# EAGLE board usbprog (EAGLE 5.11)
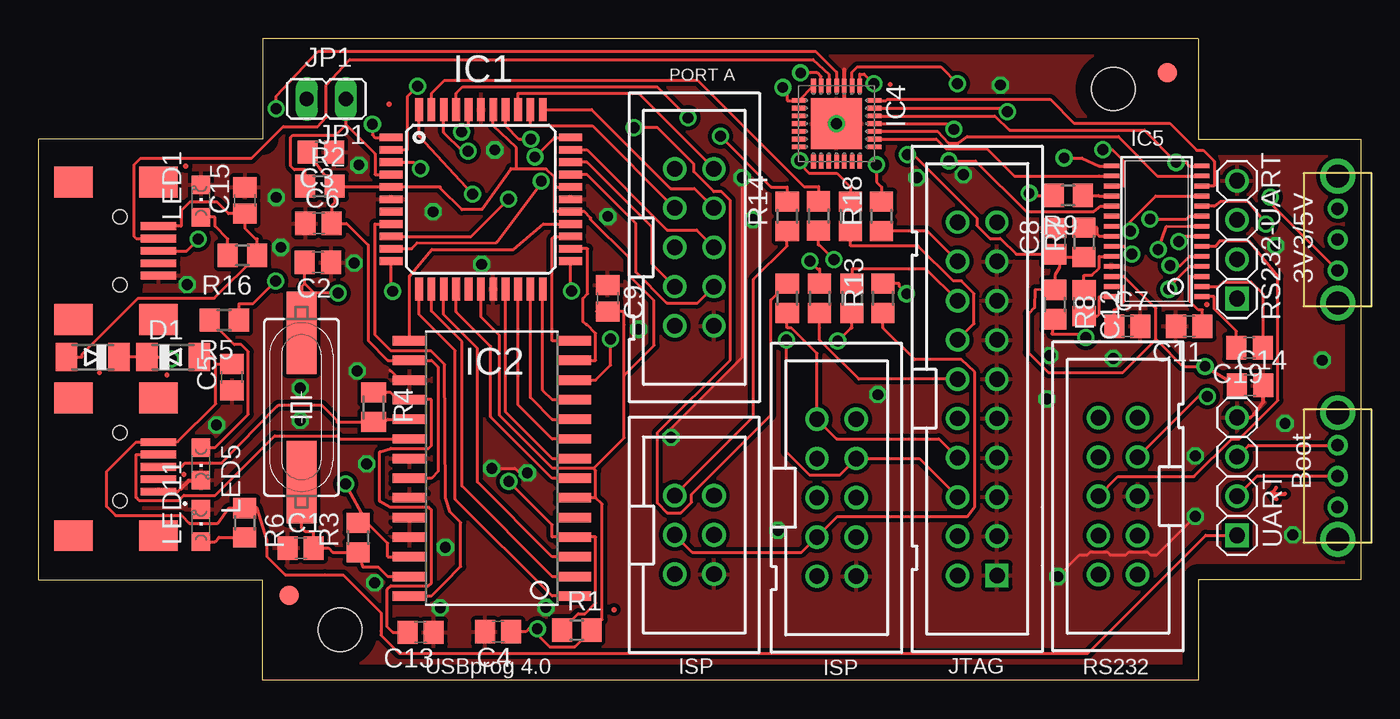
[diagram p0: board, top side]
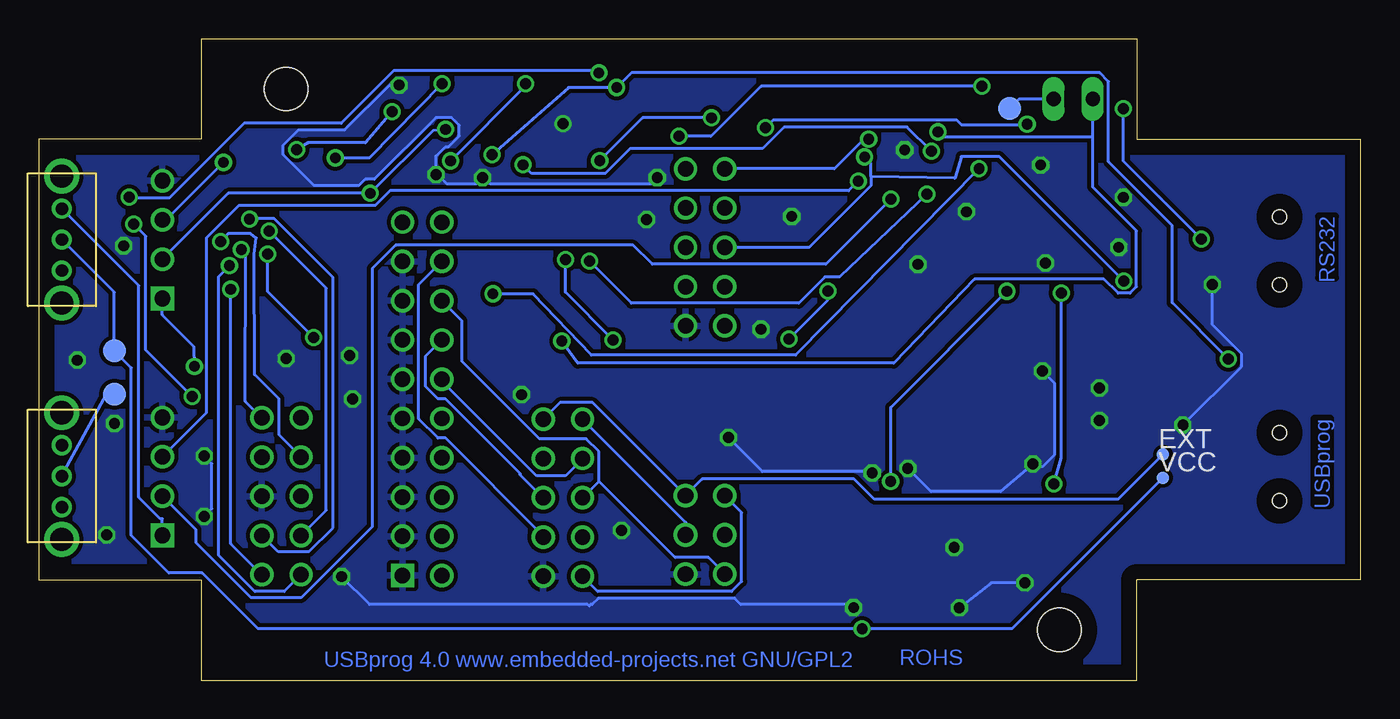
[diagram p1: board, bottom side, seen from below]

Size 85.5 x 41.5 mm. Coordinates in mm from the lower left corner, seen from the top.
Outline: 0,6.5 14.5,6.5 14.5,0 75,0 75,6.5 85.5,6.5 85.5,35 75,35 75,41.5 14.5,41.5 14.5,35 0,35 0,6.5
Copper layers (1*16): Top 0.035mm / dielectric 1.5mm / Bottom 0.035mm
Design rules "8mils *": minimum track width 8mil, minimum drill 0.6mm, track to track 10mil, track to pad 10mil, pad to pad 10mil, via to via 10mil, smd to smd 0mil, copper to edge 40mil, drill to drill 10mil, minimum pad ring 10mil, minimum via ring 8mil, stop-mask expansion 0mil, vias tented up to drill 40mil, thermal gap 10mil
Net classes: 0 default: width 0.203 mm, drill 0.7 mm, clearance 0.203 mm; 1 500mA: width 0.203 mm, drill 0.7 mm, clearance 0.203 mm; 2 CP2102: width 0.203 mm, drill 0.7 mm, clearance 0.203 mm
Holes 2.8 mm at 69.5,38.25 19.5,3.25

## Footprints (pad centres in the part's own frame; a part is rotated, then mirrored left to right if it is on the bottom)
C0805 = smd 1.3 x 1.5: 1 -0.85,0; 2 0.85,0
MINIMELF = smd 1.4 x 1.8: A 1.7,0; C -1.7,0
TP08R = smd 0.8 x 0.8: TP 0,0
PASSERMARKEN_FIDUCIAL = smd 1.27 x 1.27: 1 0,0
TQFP44 = smd 1.5 x 0.5: 1 -5.8,4; 2 -5.8,3.2; 3 -5.8,2.4; 4 -5.8,1.6; 5 -5.8,0.8; 6 -5.8,0; 7 -5.8,-0.8; 8 -5.8,-1.6; 9 -5.8,-2.4; 10 -5.8,-3.2; 11 -5.8,-4; 23 5.8,-4; 24 5.8,-3.2; 25 5.8,-2.4; 26 5.8,-1.6; 27 5.8,-0.8; 28 5.8,0; 29 5.8,0.8; 30 5.8,1.6; 31 5.8,2.4; 32 5.8,3.2; 33 5.8,4 | smd 0.5 x 1.5: 12 -4,-5.8; 13 -3.2,-5.8; 14 -2.4,-5.8; 15 -1.6,-5.8; 16 -0.8,-5.8; 17 0,-5.8; 18 0.8,-5.8; 19 1.6,-5.8; 20 2.4,-5.8; 21 3.2,-5.8; 22 4,-5.8; 34 4,5.8; 35 3.2,5.8; 36 2.4,5.8; 37 1.6,5.8; 38 0.8,5.8; 39 0,5.8; 40 -0.8,5.8; 41 -1.6,5.8; 42 -2.4,5.8; 43 -3.2,5.8; 44 -4,5.8
SO28-3 = smd 0.61 x 2.21: 1 -8.255,-5.315; 2 -6.985,-5.315; 3 -5.715,-5.315; 4 -4.445,-5.315; 5 -3.175,-5.315; 6 -1.905,-5.315; 7 -0.635,-5.315; 8 0.635,-5.315; 9 1.905,-5.315; 10 3.175,-5.315; 11 4.445,-5.315; 12 5.715,-5.315; 13 6.985,-5.315; 14 8.255,-5.315; 15 8.255,5.315; 16 6.985,5.315; 17 5.715,5.315; 18 4.445,5.315; 19 3.175,5.315; 20 1.905,5.315; 21 0.635,5.315; 22 -0.635,5.315; 23 -1.905,5.315; 24 -3.175,5.315; 25 -4.445,5.315; 26 -5.715,5.315; 27 -6.985,5.315; 28 -8.255,5.315
MLP28 = smd 0.9 x 0.3: 1 -2.45,1.5; 2 -2.45,1; 3 -2.45,0.5; 4 -2.45,0; 5 -2.45,-0.5; 6 -2.45,-1; 7 -2.45,-1.5; 15 2.45,-1.5; 16 2.45,-1; 17 2.45,-0.5; 18 2.45,0; 19 2.45,0.5; 20 2.45,1; 21 2.45,1.5 | smd 0.3 x 0.9: 8 -1.5,-2.45; 9 -1,-2.45; 10 -0.5,-2.45; 11 0,-2.45; 12 0.5,-2.45; 13 1,-2.45; 14 1.5,-2.45; 22 1.5,2.45; 23 1,2.45; 24 0.5,2.45; 25 0,2.45; 26 -0.5,2.45; 27 -1,2.45; 28 -1.5,2.45 | smd 3.3 x 3.3: EXP 0,0
MAXIM_TSSOP28 = smd 0.305 x 0.991: 1 -4.225,-2.918; 2 -3.575,-2.918; 3 -2.925,-2.918; 4 -2.275,-2.918; 5 -1.625,-2.918; 6 -0.975,-2.918; 7 -0.325,-2.918; 8 0.325,-2.918; 9 0.975,-2.918; 10 1.625,-2.918; 11 2.275,-2.918; 12 2.925,-2.918; 13 3.575,-2.918; 14 4.225,-2.918; 15 4.225,2.918; 16 3.575,2.918; 17 2.925,2.918; 18 2.275,2.918; 19 1.625,2.918; 20 0.975,2.918; 21 0.325,2.918; 22 -0.325,2.918; 23 -0.975,2.918; 24 -1.625,2.918; 25 -2.275,2.918; 26 -2.925,2.918; 27 -3.575,2.918; 28 -4.225,2.918
MINI-USB-B = smd 2.3 x 0.5: D+ -7.75,0; D- -7.75,-0.8; GND -7.75,1.6; ID -7.75,0.8; VBUS -7.75,-1.6 | smd 2.5 x 2: PAD1 -7.75,-4.45; PAD2 -7.75,4.45; PAD3 -2.25,4.45; PAD4 -2.25,-4.45 | hole 0.9: -5.25,2.2; -5.25,-2.2
JP1 = drill 0.914 long: 1 0,-1.27; 2 0,1.27
1X04 = drill 1.016 square: 1 -3.81,0 | drill 1.016 round: 2 -1.27,0; 3 1.27,0; 4 3.81,0
CHIPLED_0805 = smd 1.2 x 1.2: A 0,-1.05; C 0,1.05
TP15R = smd 1.5 x 1.5: TP 0,0
HC49UP = smd 5.334 x 1.93: 1 -4.826,0; 2 4.826,0
R0805 = smd 1.3 x 1.5: 1 -0.95,0; 2 0.95,0
M0805 = smd 1.3 x 1.6: 1 -0.95,0; 2 0.95,0
SWITCH_3X1 = drill 0.8 round: 1 -2,0; 2 0,0; 3 2,0 | drill 1.5 round: P$1 -4.1,0; P$2 4.1,0
CON-3M_PAK100/2500-10 = drill 1 pad 1.422 round: 1 -5.08,-1.27; 2 -5.08,1.27; 3 -2.54,-1.27; 4 -2.54,1.27; 5 0,-1.27; 6 0,1.27; 7 2.54,-1.27; 8 2.54,1.27; 9 5.08,-1.27; 10 5.08,1.27
PINHEADER2X3_PINHEADER3X2 = drill 1.02 round: 1 -1.27,2.54; 2 1.27,2.54; 3 -1.27,0; 4 1.27,0; 5 -1.27,-2.54; 6 1.27,-2.54
CON-3M_PAK100/2500-20 = drill 1 pad 1.422 round: 1 -11.43,-1.27; 2 -11.43,1.27; 3 -8.89,-1.27; 4 -8.89,1.27; 5 -6.35,-1.27; 6 -6.35,1.27; 7 -3.81,-1.27; 8 -3.81,1.27; 9 -1.27,-1.27; 10 -1.27,1.27; 11 1.27,-1.27; 12 1.27,1.27; 13 3.81,-1.27; 14 3.81,1.27; 15 6.35,-1.27; 16 6.35,1.27; 17 8.89,-1.27; 18 8.89,1.27; 19 11.43,-1.27 | drill 1 pad 1.422 square: 20 11.43,1.27

## Placement (x,y rotation side)
C1  22pF  [C0805]  16.94,8.55 0 top
C2  22pF  [C0805]  18.06,27.03 180 top
C3  100nF  [C0805]  18.25,34.16 180 top
C4  2.2uF  [C0805]  29.71,3.14 180 top
C5  2.2uF  [C0805]  12.5,19.6 90 top
C6  100nF  [C0805]  18.1,29.55 0 top
C7  100nF  [C0805]  70.4,22.9 0 top
C8  2.2uF  [C0805]  65.7,28.4 90 top
C9  100nF  [C0805]  36.8,24.7 270 top
C11  100nF  [C0805]  74.4,22.9 180 top
C12  100nF  [C0805]  67.6,24.4 270 top
C13  100nF  [C0805]  24.7,3.1 180 top
C14  2.2uF  [C0805]  78.33,19.08 0 top
C15  2.2uF  [C0805]  13.34,31.03 90 top
C19  100nF  [C0805]  78.3,21.5 180 top
D1  [MINIMELF]  8.7,20.9 0 top
D2  [MINIMELF]  3.5,20.9 180 top
EXT  PTR1TP08R  [TP08R]  12.8,14.6 0 bottom
FID1  [PASSERMARKEN_FIDUCIAL]  16.2,5.5 0 top
FID2  [PASSERMARKEN_FIDUCIAL]  73,39.3 0 top
IC1  MEGA32-A  [TQFP44]  28.6,31.11 0 top
IC2  USBN9604  [SO28-3]  29.3,13.7 90 top
IC4  CP21021  [MLP28]  51.6,36 270 top
IC5  MAXIM_MAX3243UI  [MAXIM_TSSOP28]  72.3,29.04 90 top
J1  MINI-USB-B  [MINI-USB-B]  0,13.8 180 top
J2  MINI-USB-B  [MINI-USB-B]  0,27.77 180 top
JP1  [JP1]  18.6,37.6 90 top
JP3  DNP  [1X04]  77.5,13.18 90 top
JP6  DNP  [1X04]  77.5,28.5 90 top
LED1  GRUEN  [CHIPLED_0805]  10.5,31 0 top
LED5  ROT  [CHIPLED_0805]  10.5,14 180 top
LED11  GRUEN  [CHIPLED_0805]  10.5,10 0 top
PD0  PTR1TP15R  [TP15R]  80.6,18.5 0 bottom
Q1  24MHz  [HC49UP]  17,17.65 90 top
R1  10K  [R0805]  34.79,3.24 0 top
R2  10K  [R0805]  18.19,31.96 0 top
R3  1M  [R0805]  20.66,9.23 90 top
R4  1K5  [M0805]  21.66,17.65 270 top
R5  270R  [R0805]  12,23.3 180 top
R6  270R  [R0805]  13.33,10.18 270 top
R7  10K  [R0805]  67.6,28.32 90 top
R8  10K  [R0805]  65.72,24.3 270 top
R9  270R  [R0805]  66.58,31.36 180 top
R10  270R  [R0805]  48.4,24.7 90 top
R11  270R  [R0805]  50.5,24.7 90 top
R12  270R  [R0805]  52.6,24.7 270 top
R13  270R  [R0805]  54.6,24.7 90 top
R14  270R  [R0805]  48.4,30 90 top
R15  270R  [R0805]  50.43,30.03 90 top
R16  270R  [R0805]  13.18,27.48 180 top
R17  270R  [R0805]  52.5,30 90 top
R18  270R  [R0805]  54.5,30 90 top
RST  PTR1TP15R  [TP15R]  22.7,37 180 bottom
TP_VCC  PTR1TP15R  [TP15R]  80.6,21.3 0 bottom
U$1  DNP  [SWITCH_3X1]  84,13.2 270 top
U$2  DNP  [SWITCH_3X1]  84,28.5 270 top
VCC  PTR1TP08R  [TP08R]  12.8,13.1 0 bottom
Y1  DNP  [CON-3M_PAK100/2500-10]  42.4,28 270 top
Y2  DNP  [PINHEADER2X3_PINHEADER3X2]  42.4,9.4 0 top
Y3  DNP  [CON-3M_PAK100/2500-10]  51.6,11.8 270 top
Y4  DNP  [CON-3M_PAK100/2500-20]  60.7,18.2 270 top
Y5  DNP  [CON-3M_PAK100/2500-10]  69.8,11.9 90 top

## Library data of the parts
C1 C2 = rcl; IC-ART: 201.011; MF: KEMET; MPN: C0805C150J5GACTU; OC_FARNELL: 1414668
C3 C6 C7 C9 C11-C13 C19 = resistor; IC-ART: 201.081; MF: AVX; MPN: 08055C104KAT2A; OC_FARNELL: 499687
C4 C5 C8 = rcl; IC-ART: 201.050; MF: KEMET; MPN: C1206C105K4RACTU; OC_FARNELL: 1650888
C14 C15 = resistor; IC-ART: 201.050; MF: AVX; MPN: 1206YC225KAT2A; OC_FARNELL: 1833824
D1 D2 = diode; IC-ART: 106.018; MF: VISHAY SEMICONDUCTOR; MPN: BAV103-GS08; OC_FARNELL: 1617729
EXT PD0 RST TP_VCC VCC = testpad
FID1 FID2 = SMDSCHABLONE
IC1 = avr; IC-ART: 100.020; MF: ATMEL; MPN: ATMEGA32A-AU; OC_FARNELL: 1704563
IC2 = bene; IC-ART: 222.333; IC-DECAL: C_SUPI; MF: NATIONAL SEMICONDUCTOR; MPN: USBN9604-28M/NOPB; OC_FARNELL: 1564747
IC4 = CP2102; IC-ART: 102.006; MF: FARNELL; MPN: CP2102-GM; OC_FARNELL: 9282130; OC_NEWARK: 30K5635
IC5 = usbprog; MF: TEXAS INSTRUMENTS; MPN: MAX3243CPWR; OC_FARNELL: 1564899; OC_NEWARK: unknown
J1 J2 = mini-usb-b; IC-ART: 300.035; OC_FARNELL: unknown
JP1 = jumper
JP3 JP6 = pinhead; OC_FARNELL: unknown
LED1 LED11 = led; IC-ART: 107.008; MF: DIALIGHT; MPN: 5988170107F; OC_FARNELL: 1465996
LED5 = led; IC-ART: 107.009; MF: DIALIGHT; MPN: 5988110107F; OC_FARNELL: 1465992
Q1 = SparkFun; MF: TXC; MPN: 9C-24.000MAAJ-T; OC_FARNELL: 1842309
R1 R7 R8 = rcl; IC-ART: 200.119; MF: VISHAY DRALORIC; MPN: CRCW080510K0FKEA; OC_FARNELL: 1469856
R2 = rcl; IC-ART: 200.119; MF: VISHAY DRALORIC; MPN: CRCW0805100KFKTA; OC_FARNELL: 1652905
R3 = rcl; IC-ART: 200.219; MF: YAGEO (PHYCOMP); MPN: RC0805FR-071ML; OC_FARNELL: 9237992
R4 = rcl; IC-ART: 200.033; MF: VISHAY DRALORIC; MPN: CRCW08051K50FKEA; OC_FARNELL: 1652940
R5 R6 = rcl; IC-ART: 200.118; MF: VISHAY DRALORIC; MPN: CRCW0805270RFKEA; OC_FARNELL: 1652970
R9 = rcl; IC-ART: 200.208; MF: VISHAY DRALORIC; MPN: CRCW080510K0FKEA; OC_FARNELL: 1469856
R10-R15 R17 R18 = rcl; IC-ART: 200.058; MF: VISHAY DRALORIC; MPN: CRCW0805100RFKEA; OC_FARNELL: 1469862
R16 = rcl; IC-ART: 200.118; MF: MULTICOMP; MPN: MC 0.1W 0805 5% 1K; OC_FARNELL: 9333711
U$1 U$2 = usbprog_SWITCH_3X1
Y1-Y5 = usbprog; OC_FARNELL: unknown

## Nets
3.3V: IC4.6 U$2.3
AVR_PB0: IC1.40 JP1.2 R12.2
AVR_PB1: IC1.41 R17.2
AVR_PB2: IC1.42 R18.2
AVR_PB3: IC1.43 R15.2
AVR_PB4: IC1.44 R11.2
AVR_PB5: IC1.1 R10.2
AVR_PB6: IC1.2 R14.2
AVR_PB7: IC1.3 R13.2
CTS_RS232: IC5.7 Y5.8
D+_UART [CP2102]: IC4.4 J2.D+
D+_USBPROG: IC2.19 J1.D+ R4.2
D-_UART [CP2102]: IC4.5 J2.D-
D-_USBPROG: IC2.20 J1.D-
DCD_RS232: IC5.4 Y5.1
DSR_RS232: IC5.6 Y5.6
DTR_RS232: IC5.11 Y5.4
EXT_VCC [500mA]: EXT.TP Y2.2 Y3.2
FORCEOFF [CP2102]: IC5.22 R7.2
FORCEON [CP2102]: IC5.23 R8.2
GND: C1.1 C2.1 C3.1 C4.2 C5.1 C6.1 C7.2 C8.2 C9.1 C11.2 C13.1 C14.2 C15.2 IC1.6 IC1.18 IC1.28 IC1.39 IC2.17 IC2.21 IC2.23 IC2.24 IC2.25 IC4.3 IC4.EXP IC5.25 J1.GND J2.GND JP3.4 JP6.4 LED1.C LED5.C LED11.C Y1.10 Y2.6 Y3.10 Y4.4 Y4.6 Y4.8 Y4.10 Y4.12 Y4.14 Y4.16 Y4.18 Y4.20 Y5.5
N$6: IC1.8 IC2.28
N$7: C13.2 IC2.18 R4.1
N$8: C2.2 IC2.26 Q1.2 R3.2
N$9: LED5.A R5.2
N$10: LED11.A R6.2
N$11: C1.2 IC2.27 Q1.1 R3.1
N$12: LED1.A R16.2
N$14 [CP2102]: IC5.20
N$21 [CP2102]: IC5.18 R9.1
N$47: C12.2 IC5.28
N$48: C12.1 IC5.24
N$49: C19.2 IC5.1
N$50: C19.1 IC5.2
N$51: C7.1 IC5.27
N$52: C11.1 IC5.3
NC: Y5.10
PA0: IC1.37 Y1.1
PA1: IC1.36 Y1.2
PA2: IC1.35 Y1.3
PA3: IC1.34 Y1.4
PA4: IC1.33 R5.1 Y1.5
PA5: IC1.32 Y1.6
PA6: IC1.31 Y1.7
PA7: IC1.30 Y1.8
PB0: R12.1 Y2.5 Y3.5 Y4.5
PB1: R18.1 Y3.8 Y4.3
PB2: R17.1 Y3.6 Y4.7
PB3: R15.1 Y3.4 Y4.15
PB4: R11.1 Y3.3 Y4.9
PB5: R10.1 Y2.4 Y3.1 Y4.13
PB6: R14.1 Y2.1 Y3.9
PB7: R13.1 Y2.3 Y3.7
PC0: IC1.19 IC2.8
PC1: IC1.20 IC2.9
PC2: IC1.21 IC2.10
PC3: IC1.22 IC2.11
PC4: IC1.23 IC2.12
PC5: IC1.24 IC2.13
PC6: IC1.25 IC2.14
PC7: IC1.26 IC2.15
PD0: IC1.9 JP3.2 PD0.TP U$1.2
PD1: IC1.10 JP3.3 U$1.1
PD2: IC1.11 IC2.4 R1.1
PD3: IC1.12 IC2.1
PD4: IC1.13 IC2.2
PD5: IC1.14 IC2.3
PD6: IC1.15 IC2.7
PD7: IC1.16
RESET: IC1.4 JP1.1 R2.1 RST.TP
RI_RS232: IC5.8 Y5.9
RTS_RS232: IC5.10 Y5.7
RXD_RS232: IC5.5 Y5.2
TXD_RS232: IC5.9 Y5.3
UART_CTS [CP2102]: IC4.23 IC5.16
UART_DCD [CP2102]: IC4.1 IC5.19
UART_DSR [CP2102]: IC4.27 IC5.17
UART_DTR [CP2102]: IC4.28 IC5.12
UART_RI [CP2102]: IC4.2 IC5.15
UART_RTS [CP2102]: IC4.24 IC5.13
UART_RXD [CP2102]: IC4.25 JP6.2 R9.2
UART_TXD [CP2102]: IC4.26 IC5.14 JP6.3
VBUS_CP2102 [500mA]: C15.1 D2.A J2.VBUS R16.1
VBUS_USBPROG [500mA]: C5.2 D1.A J1.VBUS JP3.1 R6.1 U$2.1
VBUS_USBPROG_CP2102 [500mA]: C8.1 C14.1 D1.C D2.C IC4.7 IC4.8 IC5.26 JP6.1 R7.1 R8.1
VCC [500mA]: C3.2 C4.1 C6.2 C9.2 IC1.5 IC1.17 IC1.27 IC1.29 IC1.38 IC2.6 IC2.16 IC2.22 R1.2 R2.2 TP_VCC.TP U$2.2 VCC.TP

## Tracks (layer width: path | path; a pad name or v marks a point on that pad's centre or on a via)
3.3V  (via drill 0.7 pad 0.95)
  Top 0.203: v49.27,39.28 50.36,39.28 50.6,39.05 IC4.6 | U$2.3 79.65,30.85 v79.65,31.26
  Bottom 0.203: v79.65,31.26 79.58,31.19 77.05,31.19 72.22,36.02 65.94,36.02 62.53,39.43 49.41,39.43 v49.27,39.28
AVR_PB0  (via drill 0.7 pad 0.95)
  Top 0.203: R12.2 52.6,22.8 52.53,22.8 v51.67,21.94 | IC1.40 27.8,35.85 27.73,35.85 v27.34,35.47
  Bottom 0.203: 17.33,35.13 JP1.2 | v27.34,35.47 27.01,35.13 17.33,35.13 | v51.67,21.94 50.64,20.51 30.21,20.51 24.98,25.94 16.6,25.94 15.69,25.03 14.93,25.03 14.51,25.45 14.51,29.08 17.33,31.9 17.33,35.13
AVR_PB1  (via drill 0.7 pad 0.95)
  Top 0.203: v49.22,33.61 49.22,33.4 49.82,32.8 51.61,32.8 52.5,31.91 R17.2 | IC1.41 27,37.97 27.42,38.38 39.99,38.38 v41.99,36.38
  Bottom 0.203: v41.99,36.38 46.45,36.38 v49.22,33.61
AVR_PB2  (via drill 0.7 pad 0.95)
  Top 0.203: R18.2 54.5,31.91 54.18,32.23 v54.18,33.34 | IC1.42 26.2,35.85 26.2,35.43 27.41,34.22 v27.77,34.22
  Bottom 0.203: v54.18,33.34 53.61,32.78 48.87,32.78 47.26,34.39 38.7,34.39 37.3,35.79 29.34,35.79 v27.77,34.22
AVR_PB3
  Top 0.203: IC1.43 25.4,37.97 26.25,38.81 42.6,38.81 49.48,31.93 50.43,31.93 R15.2
AVR_PB4  (via drill 0.7 pad 0.95)
  Top 0.203: v28.05,31.45 24.6,35.19 IC1.44 | R11.2 50.5,26.61 50.37,26.61 v49.87,27.1
  Bottom 0.203: v49.87,27.1 47.17,24.39 36.35,24.39 34.66,26.09 33.7,26.09 v28.05,31.45
AVR_PB5  (via drill 0.7 pad 0.95)
  Top 0.203: IC1.1 21.75,35.11 21.58,35.27 v21.58,35.97 | R10.2 47.34,24.59 47.34,17.15 42.22,12.03 42.22,11.52 41.53,10.83 40.64,10.83 40.02,11.45 40.02,16.02 44.73,20.73 44.73,31.04 44.17,31.59 43.66,31.59 42.37,32.89 42.37,33.39 40.03,35.73 v38.51,35.73
  Bottom 0.203: v38.51,35.73 37.99,36.25 26.15,36.25 25.84,35.95 21.61,35.95 v21.58,35.97
AVR_PB6  (via drill 0.7 pad 0.95)
  Top 0.203: R14.2 48.4,31.91 47.37,31.91 v44.09,35.18 | IC1.2 23.86,34.31 23.86,37.77 v24.5,38.42
  Bottom 0.203: v44.09,35.18 42.03,35.18 38.79,38.42 v24.5,38.42
AVR_PB7  (via drill 0.7 pad 0.95)
  Top 0.203: R13.2 55.66,25.65 55.66,25.46 v56.13,24.99 | v24.69,33.08 24.26,33.51 IC1.3
  Bottom 0.203: v56.13,24.99 53.53,24.99 49.76,21.02 36.55,21.02 v24.69,33.08
CTS_RS232  (via drill 0.7 pad 0.95)
  Top 0.203: v73.74,28.38 74.08,28.71 IC5.7
  Bottom 0.203: Y5.8 69.96,15.87 69.96,18.19 71.54,19.77 71.57,27.58 71.47,28.33 71.43,28.61 71.8,28.88 73.23,28.88 v73.74,28.38
D+_UART  (via drill 0.7 pad 0.95)
  Top 0.203: v15.37,36.96 15.37,37.78 18.08,40.67 50.24,40.67 51.6,39.34 IC4.4 | J2.D+ 9.56,27.77 v10.31,28.52
  Bottom 0.203: v10.31,28.52 15.37,33.58 v15.37,36.96
D+_USBPROG
  Top 0.203: J1.D+ 9.21,13.8 9.45,14.04 11.85,14.04 15.4,17.7 15.5,17.8 18.3,17.8 19.3,16.8 19.3,16.7 R4.2 22.4,16.7 22.57,16.88 IC2.19
D-_UART
  Top 0.203: IC4.5 51.1,39.2 50.07,40.14 20.11,40.14 18.6,38.5 18.6,36.4 18.05,35.81 15.81,35.81 13.77,33.76 6.58,33.76 6.18,33.36 6.18,28.68 6.29,28.57 J2.D-
D-_USBPROG
  Top 0.203: J1.D- 6.29,14.6 6.29,11.82 6.47,11.64 9.08,11.64 9.39,11.96 11.42,11.96 15.28,15.81 19.3,15.81 19.51,15.61 IC2.20
DCD_RS232  (via drill 0.7 pad 0.95)
  Top 0.203: v73.08,25.28 73.08,25.43 74.42,26.77 IC5.4
  Bottom 0.203: v73.08,25.28 73.08,8.83 Y5.1
DSR_RS232
  Top 0.203: Y5.6 69.8,13.17 74.71,13.17 77.14,15.61 77.64,15.61 80.14,18.11 80.14,26.11 78.25,28.41 76.38,28.41 76.14,28.07 IC5.6
DTR_RS232  (via drill 0.7 pad 0.95)
  Top 0.203: IC5.11 72.24,31.32 70.6,29.67 v70.6,29.06
  Bottom 0.203: Y5.4 66.9,10.99 66.9,25.36 v70.6,29.06
EXT_VCC
  Bottom 0.203: EXT.TP 15.7,11.7 31.44,11.7 32.77,13.02 42.59,13.02 Y2.2 49.68,17.95 51.8,17.95 Y3.2
FORCEOFF
  Top 0.203: IC5.22 68.58,28.71 68.45,28.85 68.45,29.27 R7.2
FORCEON  (via drill 0.7 pad 0.95)
  Top 0.203: R8.2 65.52,22.39 67.48,22.39 v67.71,22.17 | IC5.23 70.18,28.07 70.7,27.55 v70.69,27.56
  Bottom 0.203: v67.71,22.17 70.7,25.16 v70.69,27.56
GND  (via drill 0.7, 0.7 pad 0.95)
  Top 0.203: v65.9,6.7 67.3,8.1 67.8,8.1 68,8.3 69.1,8.3 69.3,8.1 70.3,8.1 70.5,8.3 71.7,8.3 71.9,8.1 72.3,8.1 v74.8,10.6 | 78.6,17.2 78.4,17 JP3.4 | 9.2,12.4 9,12.2 7.8,12.2 J1.GND | IC4.EXP 52.2,36 52.2,37 52.1,37.1 52.1,37.3 52.1,38.4 IC4.3 | v45.5,32.5 45.5,20.9 40.9,16.3 v40.9,15.7 | v31.6,13.4 31.1,13.4 30.8,13.7 v29.3,13.7 | IC2.17 23.9,19.5 23.3,19.5 22.8,20 22.72,20.04
  Top 0.25: LED5.C 9.7,12.9 9.2,12.4 | C14.2 79.2,18 78.6,17.2 | 52.1,37.3 52.1,39.5
  Bottom 0.203: v21.73,6.3 23.9,6.3 v25.97,4.68 | v32.8,4.7 33,4.7 33.2,4.9 40.1,4.9 40.5,5.3 49.3,5.3 49.7,4.9 49.8,4.9 49.9,4.8 50,4.9 64.1,4.9 v65.9,6.7 | v74.8,10.6 74.3,11.1 74.3,14 v74.8,14.5 | v9.6,25.6 9.6,23 7.7,21.1 7.7,20.3 v11.5,16.5 | v62.2,38.5 62.8,38.5 65.7,35.6 68.7,35.6 69.7,34.6 69.7,34 67.7,32 64.8,32 64.4,32.4 63.8,32.4 59.8,36.4 58.8,36.4 58.3,35.9 58.3,35.2 59,34.5 59.2,34.5 59.8,33.9 v59.8,32.7 59.7,32.7 59.1,32.1 57.2,32.1 v56.8,32.5 56.7,32.5 56.3,32.1 45.9,32.1 v45.5,32.5 | v40.9,15.7 38.7,13.5 31.7,13.5 v31.6,13.4 | v29.3,13.7 27.8,12.2 23.3,12.2 v21.2,14 21.6,13.8 20.6,13.8 19.8,14.6 19.8,19.2 v20.6,20
  other vias: 26.3,8.6 16.9,16.8 16.9,18.9 69.5,20.8 65.4,21 65.2,18.2 80,28.1 83,20.7 81.1,9.4 80.6,16.6 38.8,22.7 36.8,30 46.2,29.8 25.5,30.3 29.5,34.3 15.36,31.23 20.71,33.33 20.41,26.99 15.66,28 28.65,26.9 54.28,18.47 47.8,9.7 51.6,36
  pour Bottom: -4.6,46.5 86.4,45.3 86.4,-2.3 -4.6,-1.1
  pour Top: -2.1,43 87.5,43 87.5,-1.2 -2.5,-1.2
N$4
  Top 0.25: 79.97,12.06 80.61,12.06
N$5
  Top 0.25: 80.01,12.45 79.77,12.11
N$6
  Top 0.203: IC1.8 21.75,29.51 21.75,22.34 22.79,21.3 25.37,21.3 26.26,20.41 26.3,11.8 26.6,10.9 27.3,10.2 27.3,7.35 26.26,6.31 25.39,5.45 IC2.28
N$7
  Top 0.203: C13.2 22.89,3.1 22.54,3.45 22.54,5.87 22.78,6.11 25.23,6.11 25.39,6.27 25.39,11.02 25.23,11.19 22.73,11.19 22.06,11.56 22.06,14.78 22.78,14.99 25.22,14.99 25.39,15.17 25.39,18.14 IC2.18 23.22,18.14 22.77,18.6 R4.1
N$8  (via drill 0.7 pad 0.95)
  Top 0.203: 21.25,10.18 v19.85,12.7 | 21.25,10.18 22.57,8.86 22.57,7.99 IC2.26 | 21.25,10.18 R3.2 | 17.21,25.66 C2.2 | 17.21,25.66 17,25.45 17,23.31 Q1.2 | v19.37,25.05 17.82,25.05 17.21,25.66
  Bottom 0.203: v19.85,12.7 19.37,14.38 v19.37,25.05
N$9
  Top 0.203: R5.2 12.65,21.7 13.1,21.7 13.55,21.25 13.55,17.2 11.4,15.05 LED5.A
N$10
  Top 0.203: R6.2 11.64,9.25 11.64,9.19 11.4,8.95 LED11.A
N$11
  Top 0.203: IC2.27 22.57,6.71 21.96,7.33 20.96,7.33 R3.1 19.02,8.28 18.75,8.55 C1.2 17.79,9.61 17.25,9.61 17,9.85 Q1.1
N$12
  Top 0.203: LED1.A 11.4,29.95 11.4,29.36 12.23,28.54 R16.2
N$13
  Top 0.25: 80.04,11.71 79.71,12.12
N$21
  Top 0.203: IC5.18 68.58,31.32 68.54,31.36 R9.1
N$47
  Top 0.203: C12.2 68.45,23.55 68.58,23.68 68.58,24.82 IC5.28
N$48
  Top 0.203: C12.1 67.6,26.2 68.12,26.2 68.58,26.67 68.58,27.41 IC5.24
N$49
  Top 0.203: IC5.1 76.02,24.82 76.02,24.02 77.45,22.58 C19.2
N$50
  Top 0.203: IC5.2 76.32,25.46 76.61,25.76 78.39,25.76 79.15,25 C19.1
N$51
  Top 0.203: C7.1 69.55,23.95 69.63,23.95 70.18,24.51 70.18,25.46 IC5.27
N$52
  Top 0.203: C11.1 75.25,23.95 75,23.95 74.42,24.54 74.42,26.11 IC5.3
PA0  (via drill 0.7 pad 0.95)
  Top 0.203: IC1.37 30.2,35.85 31.05,35.01 v31.83,35.01
  Bottom 0.203: Y1.1 34.04,33.08 32.12,35.01 v31.83,35.01
PA1
  Top 0.203: Y1.2 38.78,37.97 31,37.97 IC1.36
PA2
  Top 0.203: IC1.35 31.8,35.85 35.81,35.85 Y1.3
PA3
  Top 0.203: Y1.4 42.4,31.81 40.86,31.81 35.76,36.91 IC1.34
PA4  (via drill 0.7 pad 0.95)
  Top 0.203: IC1.33 33.34,35.11 33.34,35.1 v32.09,33.85 | R5.1 12.95,24.36 13.86,24.36 v15.32,25.81
  Bottom 0.203: 31.69,32.58 26.27,32.48 25.83,33.87 23.38,33.87 v15.32,25.81 | 31.69,32.58 31.69,33.45 v32.09,33.85 | Y1.5 35.67,28 31.69,31.98 31.69,32.58
PA5
  Top 0.203: Y1.6 42.54,29.13 40.64,29.13 35.45,34.31 IC1.32
PA6
  Top 0.203: IC1.31 35.45,33.51 39.66,29.3 39.66,26.93 Y1.7
PA7
  Top 0.203: IC1.30 35.45,32.71 38.63,29.54 38.63,26.39 40.61,24.41 42.62,24.41 Y1.8
PB0
  Top 0.203: R12.1 52.6,26.61 57.38,26.61 Y4.5
  Bottom 0.203: 49.27,12.86 49.27,14.79 50.09,15.61 53.12,15.61 58.13,20.62 58.13,23.25 Y4.5 | 49.27,12.86 Y3.5 | 49.27,12.86 44.35,7.93 42.2,7.93 Y2.5
PB1
  Top 0.203: Y4.3 57.47,29.05 R18.1
  Bottom 0.203: Y4.3 60.91,25.61 60.91,16.9 59.67,15.66 59.19,15.66 52.87,9.35 Y3.8
PB2
  Top 0.203: R17.1 52.5,28.09 56.87,28.09 59.14,25.82 59.67,25.82 60.48,25.01 60.48,23.07 Y4.7
  Bottom 0.203: Y4.7 60.48,20.95 60.48,19.01 59.67,18.2 59.19,18.2 54.35,13.37 54.35,13.29 | 54.35,13.29 | Y3.6 54.35,13.29
PB3  (via drill 0.7 pad 0.95)
  Top 0.203: v48.35,22.01 48.35,14.77 49.85,13.27 51.8,13.27 Y3.4 56.94,14.34 Y4.15 | R15.1 50.43,28.12 50.52,28.12 v51.44,27.2
  Bottom 0.203: v48.35,22.01 51.44,25.09 v51.44,27.2
PB4
  Top 0.203: Y4.9 53.03,19.47 50.5,22 50.5,22.8 R11.1
  Bottom 0.203: Y4.9 59.43,19.36 53.3,13.23 51.44,13.23 Y3.3
PB5
  Top 0.203: R10.1 48.4,22.8 48.67,22.8 50.33,21.13 Y3.1 51.6,15.61 58.21,15.61 Y4.13
  Bottom 0.203: Y3.1 43.67,10.22 Y2.4
PB6
  Top 0.203: R14.1 48.4,28.09 46.24,25.93 46.24,17.05 Y2.1
  Bottom 0.203: Y3.9 49.35,5.74 40.68,5.74 40.04,6.38 40.04,10.85 Y2.1
PB7
  Top 0.203: Y2.3 42.26,8.27 49.34,8.27 Y3.7 51.65,10.58 60.05,10.59 60.53,11.24 60.53,19.94 59.67,20.74 56.66,20.74 54.6,22.8 R13.1
PC0
  Top 0.203: IC2.8 33.2,14.34 30.2,17.34 IC1.19
PC1
  Top 0.203: IC2.9 33.2,15.61 31,17.81 IC1.20
PC2
  Top 0.203: IC2.10 33.2,16.88 31.8,18.28 IC1.21
PC3
  Top 0.203: IC2.11 33.2,18.14 32.6,18.75 IC1.22
PC4  (via drill 0.7 pad 0.95)
  Top 0.203: IC2.12 36.02,19.41 36.99,20.38 v36.99,22.07 | v34.46,25.18 34.4,25.24 IC1.23
  Bottom 0.203: v36.99,22.07 34.46,24.6 v34.46,25.18
PC5
  Top 0.203: IC1.24 35.45,27.91 35.5,27.9 35.5,25 35.2,24.7 35.2,23.2 35.4,23 35.45,23 36.02,22.43 36.02,20.68 IC2.13
PC6
  Top 0.203: IC1.25 33.34,28.71 33.2,28.57 33.2,21.95 IC2.14
PC7
  Top 0.203: IC2.15 23.98,26.14 25.41,27.86 30.71,27.86 32.64,29.51 IC1.26
PD0  (via drill 0.7 pad 0.95)
  Top 0.203: U$1.2 78.79,13.2 JP3.2 | v30.38,31.12 27.96,28.71 IC1.9
  Bottom 0.203: JP3.2 75.33,9.74 75.33,8.89 71.76,5.33 68.53,5.33 63.93,9.93 63.93,26.64 62.41,28.15 47.05,28.15 45.81,26.91 34.6,26.91 v30.38,31.12 | U$1.2 81.1,18.5 PD0.TP
PD1  (via drill 0.7 pad 0.95)
  Top 0.203: IC1.10 24.12,27.91 24.47,28.29 29.6,28.31 32.41,32.05 | 32.41,32.05 32.54,32.23 | 32.5,32.14 v32.5,32.28 32.5,32.1 32.41,32.05 | U$1.1 78.25,15.2 JP3.3
  Bottom 0.203: JP3.3 74.66,17.29 74.66,28.61 72.55,30.71 63.73,30.71 62.78,31.66 33.12,31.66 v32.5,32.28
PD2  (via drill 0.7 pad 0.95)
  Top 0.203: R1.1 34.9,4.29 35.32,4.29 36.02,5 36.02,9.26 IC2.4 33.2,9.26 33.2,10.05 v30.4,12.85 | v22.89,25.16 22.8,25.25 IC1.11
  Bottom 0.203: v30.4,12.85 30.4,17.65 v22.89,25.16
PD3
  Top 0.203: IC2.1 33.2,5.45 26.94,11.71 26.94,21.31 24.6,23.66 IC1.12
PD4
  Top 0.203: IC1.13 25.4,24.25 25.4,23.87 27.37,21.9 27.37,12.55 33.2,6.71 IC2.2
PD5
  Top 0.203: IC2.3 33.2,7.99 28.38,12.81 28.38,21.47 26.2,23.64 IC1.14
PD6
  Top 0.203: IC2.7 33.2,13.06 29.23,17.04 29.23,21.59 27,23.82 IC1.15
RESET
  Top 0.203: 19.87,35.92 21.75,34.05 21.75,32.71 IC1.4 | R2.1 17.24,33.02 16.53,33.02 16.3,33.25 16.3,35.12 16.43,35.26 19.2,35.26 19.87,35.92 | 19.87,35.92 JP1.1
  Bottom 0.203: RST.TP 22.1,37.6 20.86,37.6 JP1.1
RI_RS232  (via drill 0.7 pad 0.95)
  Top 0.203: v72.39,27.85 72.94,29.36 74.42,29.36 IC5.8
  Bottom 0.203: Y5.9 72.13,18.04 72.13,27.67 72.31,27.85 v72.39,27.85
RTS_RS232  (via drill 0.7 pad 0.95)
  Top 0.203: IC5.10 76.02,30.66 76.41,30.96 78.22,30.96 v79.36,29.51 | Y5.7 74.98,18.35 v75.57,18.35
  Bottom 0.203: v75.57,18.35 78.57,21.35 78.57,28.72 v79.36,29.51
RXD_RS232  (via drill 0.7 pad 0.95)
  Top 0.203: IC5.5 74.42,27.41 73.81,26.81 v73.17,26.81
  Bottom 0.203: Y5.2 69.62,5.73 71.52,5.73 73.87,8.09 73.87,26.11 v73.17,26.81
TXD_RS232  (via drill 0.7 pad 0.95)
  Top 0.203: IC5.9 74.42,30.02 74.24,29.84 v71.87,29.84
  Bottom 0.203: Y5.3 70.01,8.3 68.03,8.3 66.47,9.87 66.47,26.05 70.27,29.85 71.85,29.85 v71.87,29.84
UART_CTS
  Top 0.203: IC4.23 58.05,35 58.68,34.38 61.33,34.38 63.09,32.61 68.58,32.61 IC5.16
UART_DCD  (via drill 0.7 pad 0.95)
  Top 0.203: IC4.1 53.1,39.2 53.38,39.2 v54.01,38.58 | IC5.19 68.68,30.66 68.22,30.3 63.88,30.3 60.59,33.59 v58.87,33.59
  Bottom 0.203: v58.87,33.59 54.01,38.45 v54.01,38.58
UART_DSR  (via drill 0.7 pad 0.95)
  Top 0.203: IC5.17 70.18,31.96 70.18,33.58 69.45,34.31 v68.81,34.31 | IC4.27 62.43,37 v62.65,36.78
  Bottom 0.203: v68.81,34.31 68.06,34.77 64.36,34.77 v62.65,36.78
UART_DTR
  Top 0.203: IC4.28 54.8,37.5 54.88,37.57 65.41,37.57 66.95,36.03 73.14,36.03 74.89,34.28 75.31,34.28 76.02,33.57 76.02,31.96 IC5.12
UART_RI  (via drill 0.7 pad 0.95)
  Top 0.203: v66.31,33.78 67.46,33.78 68.58,33.27 IC5.15 | IC4.2 52.6,39.34 52.93,39.67 58.34,39.67 v59.41,38.59
  Bottom 0.203: v66.31,33.78 64.12,33.78 v59.41,38.59
UART_RTS
  Top 0.203: IC4.24 58.13,35.5 58.84,34.75 59.48,34.75 60.05,35.17 69.83,35.17 72.33,32.61 74.42,32.61 IC5.13
UART_RXD  (via drill 0.7 pad 0.95)
  Top 0.203: R9.2 64.19,31.36 v64.06,31.5 | IC4.25 58.73,36 v59.19,35.63
  Bottom 0.203: JP6.2 73.23,31.5 v64.06,31.5 59.99,35.56 v59.19,35.63
UART_TXD  (via drill 0.7 pad 0.95)
  Top 0.203: IC4.26 61.82,36.5 62.78,35.58 71.51,35.58 v73.55,33.5 74.18,33.5 74.42,33.27 IC5.14
  Bottom 0.203: JP6.3 77.28,29.77 v73.55,33.5
VBUS_CP2102
  Top 0.203: D2.A 2.81,20.9 2.81,21.09 6.42,24.71 11.36,24.71 R16.1 14.13,28.01 14.13,28.54 14.03,28.54 13.34,29.23 C15.1 12.29,30.18 11.55,30.91 9.75,30.91 9.21,30.37 9.21,29.37 J2.VBUS
VBUS_USBPROG
  Top 0.203: JP3.1 75.47,9.37 67.84,1.74 23.31,1.74 22.14,2.91 22.14,3.19 22.14,4.36 19.7,6.8 18.52,6.82 15.94,6.82 14.75,8.01 14.75,9.05 14.11,11.16 13,11.14 | 13,11.14 12.3,11.14 11.57,10.14 9.75,10.14 9.24,10.65 4.97,10.65 4.39,11.24 4.39,13.5 6.29,15.4 J1.VBUS 9.01,15.44 11.46,17.87 11.45,20.45 | 13,11.14 R6.1 | D1.A 11.4,20.9 11.4,20.49 11.45,20.45 | 11.45,20.45 C5.2
  Bottom 0.203: JP3.1 77.5,10.44 77.63,10.44 79.03,11.83 79.03,25.53 U$2.1
VBUS_USBPROG_CP2102  (via drill 0.7 pad 0.95)
  Top 0.203: v75.42,20.3 75.44,20.16 75.42,20.28 C14.1 | v8.56,20.79 8.12,20.79 8.01,20.9 D1.C D2.C | 72.25,22.05 72.25,24.04 70.18,26.11 IC5.26 | v56.19,33.99 56.57,33.99 60.67,29.89 60.67,29.42 61.51,28.57 62.19,28.57 63.21,27.55 C8.1 66.01,27.04 | 66.01,27.04 66.01,26.7 65.72,26.2 R8.1 64.42,25.26 64.4,24.1 64,23.7 64,21.2 65.3,19.9 70.1,19.9 72.2,22 72.25,22.05 | 66.01,27.04 | 66.01,27.04 66.34,27.36 R7.1 | v48.12,38.34 48.4,38.07 48.4,37.5 IC4.8 IC4.7 | v75.42,20.3 75.4,20.3 | 72.25,22.05 72.3,22 74,20.3 75.3,20.3 v75.42,20.3
  Bottom 0.203: v75.42,20.3 75.44,21.57 77.5,23.62 JP6.1 | v8.56,20.79 12.19,24.42 12.19,29.41 16.33,33.54 16.33,38.73 16.88,39.29 47.18,39.29 v48.12,38.34 51.24,38.34 v56.19,33.99
VCC  (via drill 0.7 pad 0.95)
  Top 0.203: 35.87,13.7 33.23,13.7 29.79,17.14 29.79,22.31 28.6,23.5 IC1.17 | 36.02,11.79 36.02,13.55 35.87,13.7 | 35.87,13.7 37.85,15.68 37.85,19.71 | 37.85,19.71 37.85,23 37.85,23.85 | 33.34,31.91 33.34,30.31 IC1.27 35.3,30.3 35.7,29.9 35.7,29.8 38.2,27.3 38.19,27.29 38.19,26.17 39.79,24.57 39.8,21.66 37.85,19.71 | 36.02,11.79 36.43,11.39 36.43,3.93 R1.2 34.68,2.18 33.03,2.18 32.25,2.95 v32.25,3.33 31.7,3.33 31.52,3.14 C4.1 | 36.02,11.79 IC2.6 | IC2.22 25.39,13.06 25.82,13.49 25.82,20.26 25.39,20.68 IC2.16 22.57,20.68 21.32,21.96 21.32,28.16 19.91,29.55 C6.2 18.95,30.71 19.14,30.91 19.14,31.88 19.14,31.91 | 30.56,33.07 30.54,33.1 30.9,33.1 30.89,34.44 29.4,35.85 IC1.38 | 30.56,33.07 28.68,30.45 27.38,30.44 25.98,31.81 25.98,31.91 23.86,31.91 IC1.5 21.75,31.91 19.14,31.91 | 33.34,31.91 33.34,32.54 32.82,33.07 30.56,33.07 | C3.2 18.72,32.34 19.2,31.75 19.11,32.23 R2.2 19.14,31.91 | 33.34,31.91 IC1.29 | 37.85,23.85 37.7,23.85 | 37.7,23.85 C9.2 | 37.85,23.85 37.7,23.85 | 37.7,23.85 36.05,23.85
  Bottom 0.203: U$2.2 80.6,25.1 TP_VCC.TP 79.51,20.21 79.51,9.36 77.08,6.94 74.93,6.94 71.32,3.33 v32.25,3.33 22.57,3.33 VCC.TP
(copper drawn outside any net)
  shapes: Top circle x8

## Text on the board
Bottom: RS232 | USBprog | USBprog 4.0 www.embedded-projects.net GNU/GPL2 | ROHS
tPlace: PORT A
tNames: JP1 | 3V3/5V | RS232-UART | Boot | UART | USBprog 4.0 | ISP | ISP | JTAG | RS232